# EAGLE board ATmga8_testBoard_v4_print (EAGLE 6.5.0), part 1 of 3
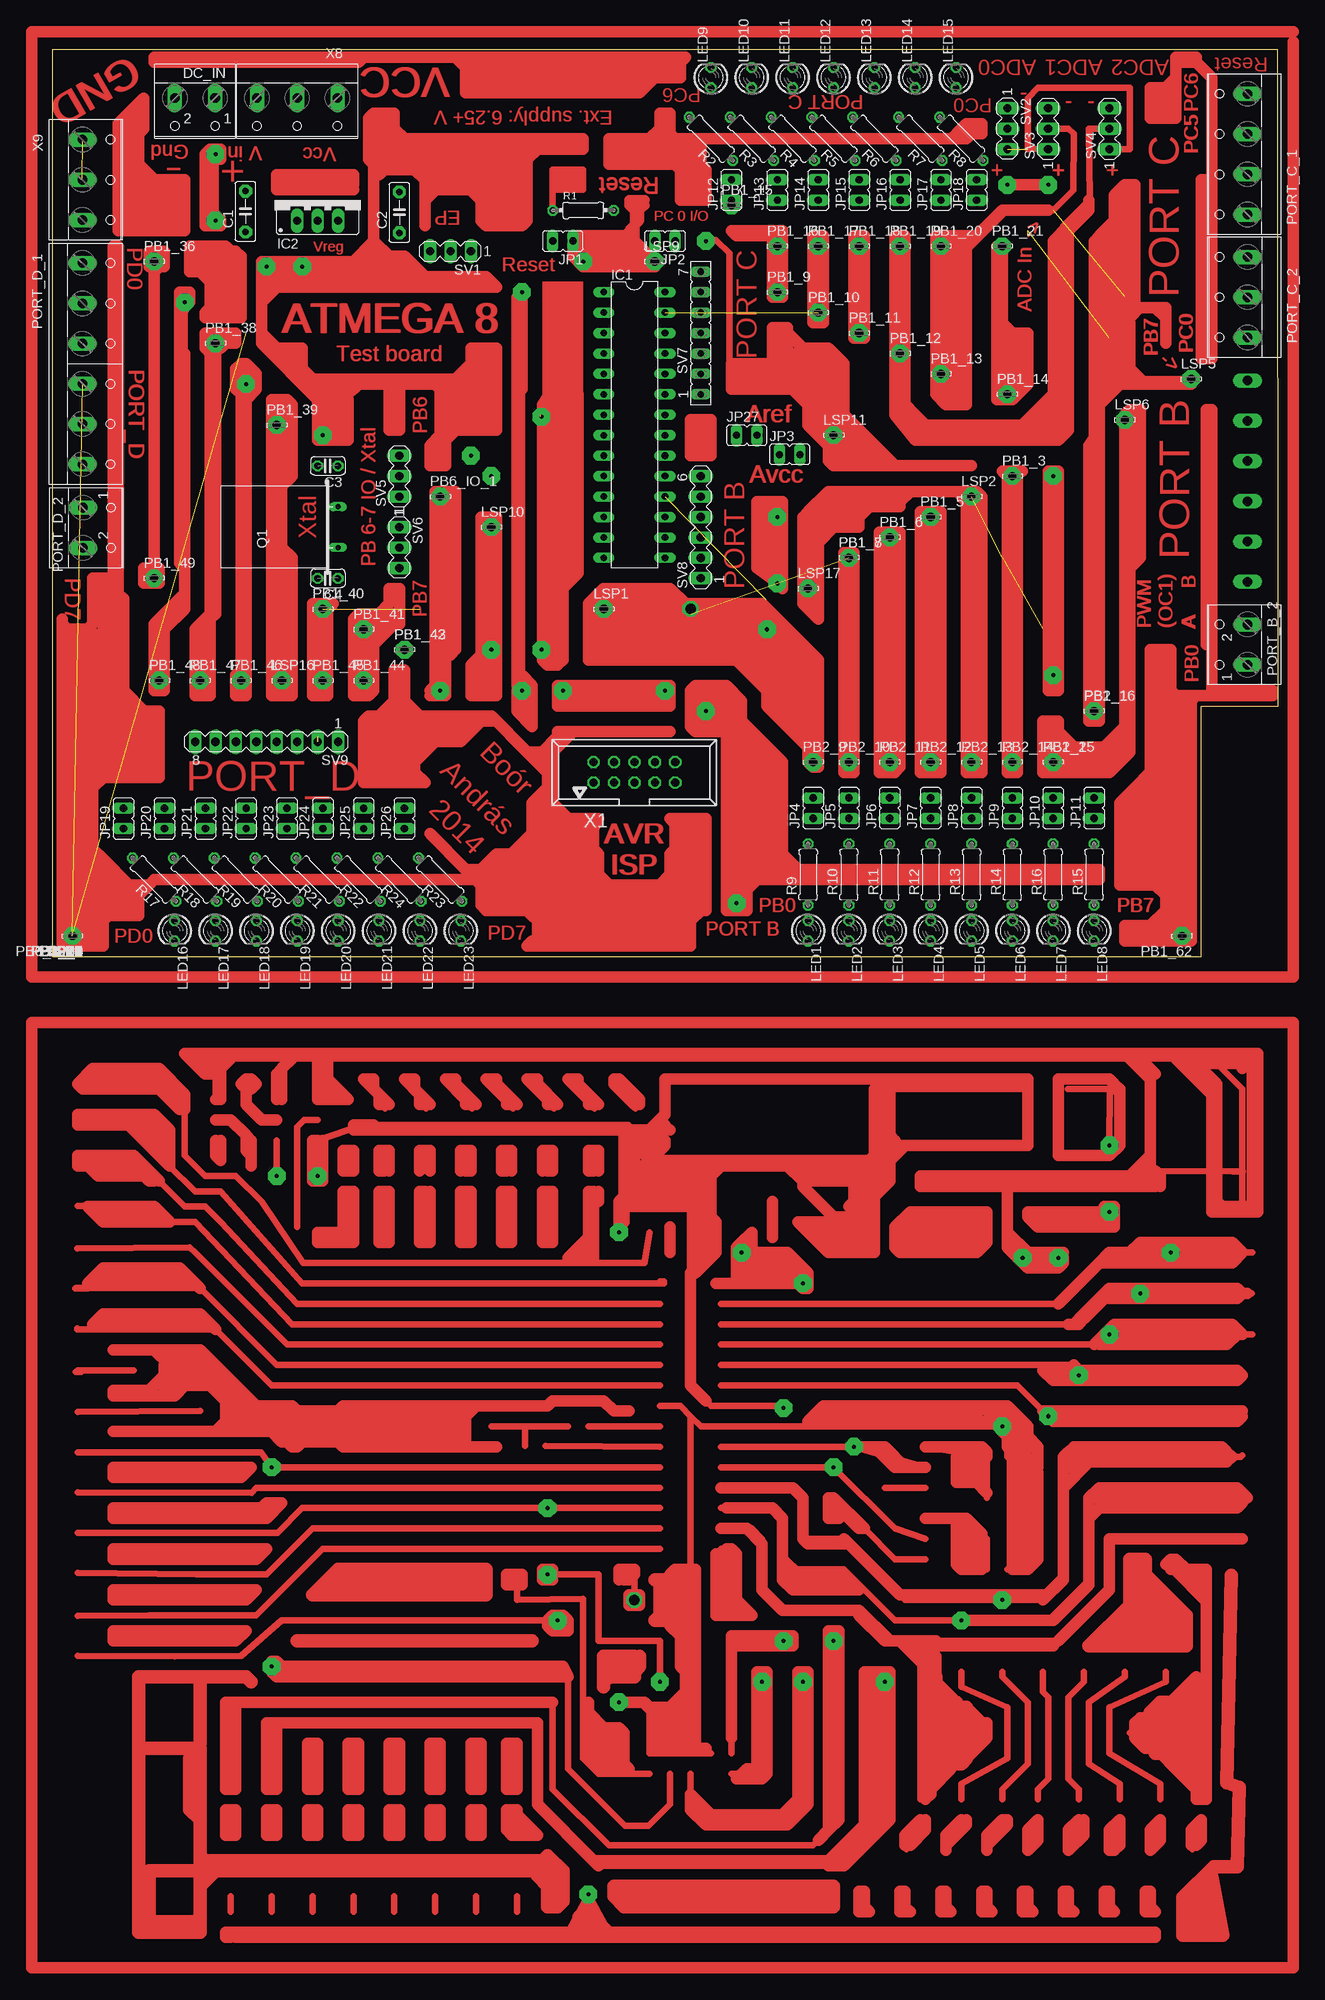
[diagram p0: board, top side]
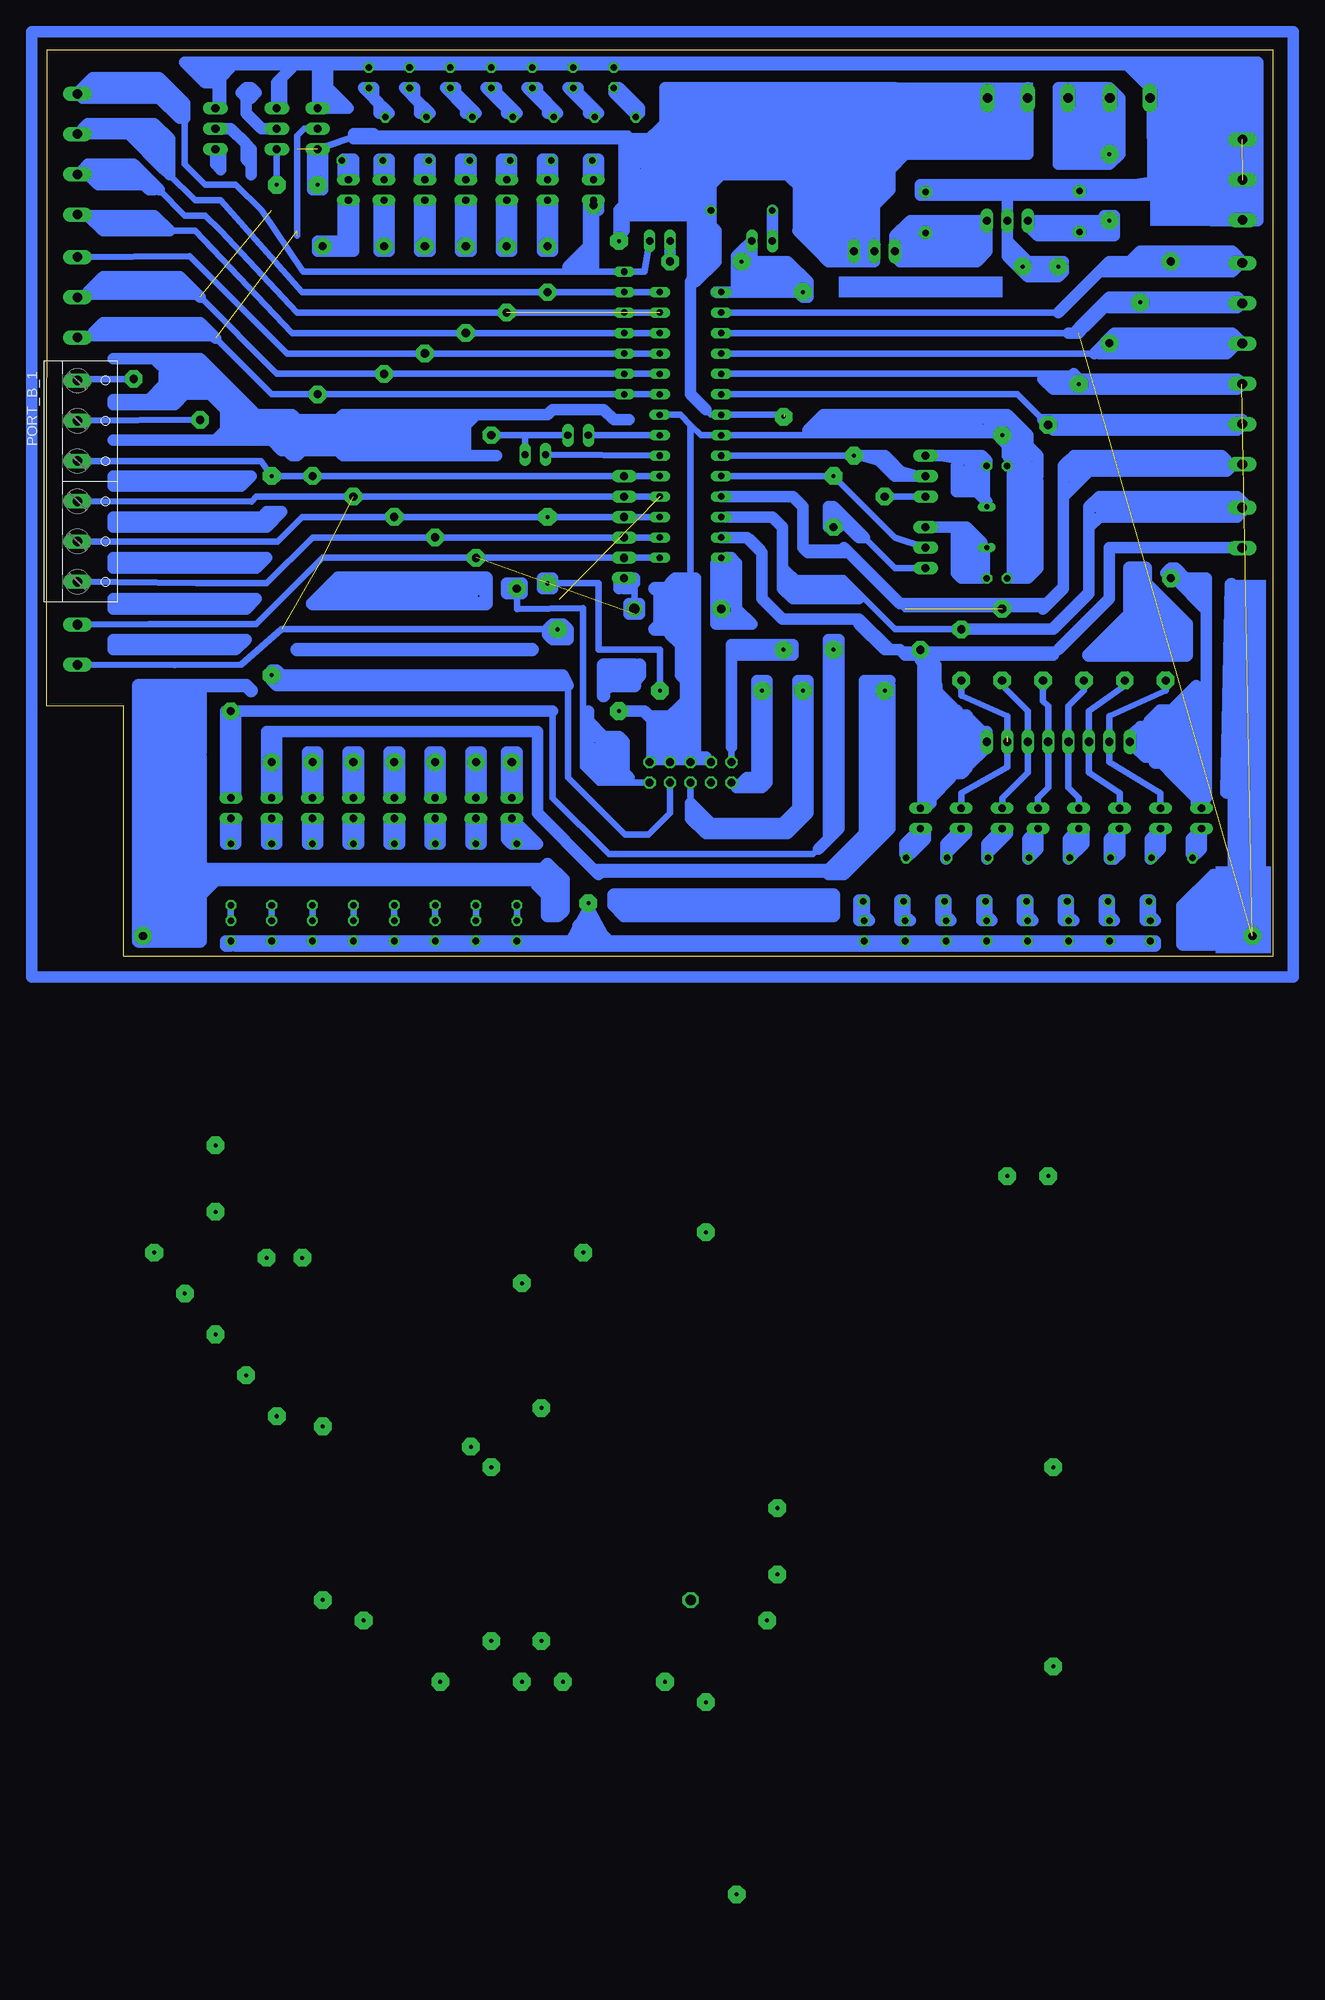
[diagram p1: board, bottom side, seen from below]

Size 152.4 x 112.7 mm. Coordinates in mm from the lower left corner, seen from the top.
Outline: 0,0 142.88,0 142.88,31.11 152.4,31.11 152.38,112.7 0,112.7 0,0
Copper layers (1*16): Top 0.035mm / dielectric 1.5mm / Bottom 0.035mm
Design rules "default": minimum track width 10mil, minimum drill 24mil, track to track 8mil, track to pad 8mil, pad to pad 8mil, via to via 8mil, smd to smd 8mil, copper to edge 40mil, drill to drill 8mil, minimum pad ring 10mil, minimum via ring 8mil, stop-mask expansion 4mil, vias tented up to drill 0mil, thermal gap 10mil

## Footprints (pad centres in the part's own frame; a part is rotated, then mirrored left to right if it is on the bottom)
C5B2.5 = drill 0.813 pad 1.6 octagon: 1 -2.54,0; 2 2.54,0
C025-024X044 = drill 0.813 octagon: 1 -1.27,0; 2 1.27,0
W237-102 = drill 1.194 long: 1 -2.5,-1.27; 2 2.5,-1.27
DIL28-3 = drill 0.813 long: 1 -16.51,-3.81; 2 -13.97,-3.81; 3 -11.43,-3.81; 4 -8.89,-3.81; 5 -6.35,-3.81; 6 -3.81,-3.81; 7 -1.27,-3.81; 8 1.27,-3.81; 9 3.81,-3.81; 10 6.35,-3.81; 11 8.89,-3.81; 12 11.43,-3.81; 13 13.97,-3.81; 14 16.51,-3.81; 15 16.51,3.81; 16 13.97,3.81; 17 11.43,3.81; 18 8.89,3.81; 19 6.35,3.81; 20 3.81,3.81; 21 1.27,3.81; 22 -1.27,3.81; 23 -3.81,3.81; 24 -6.35,3.81; 25 -8.89,3.81; 26 -11.43,3.81; 27 -13.97,3.81; 28 -16.51,3.81
78XXS = drill 1.016 long: GND 0,-2.54; IN -2.54,-2.54; OUT 2.54,-2.54
JP1 = drill 0.914 long: 1 0,-1.27; 2 0,1.27
LED3MM = drill 0.813 octagon: A -1.27,0; K 1.27,0
LSP10 = drill 1.016 pad 2.159 octagon: MP 0,0
W237-6 = drill 1.194 long: 1 -12.5,-1.27; 2 -7.5,-1.27; 3 -2.5,-1.27; 4 2.5,-1.27; 5 7.5,-1.27; 6 12.5,-1.27
W237-4 = drill 1.194 long: 1 -7.5,-1.27; 2 -2.5,-1.27; 3 2.5,-1.27; 4 7.5,-1.27
W237-103 = drill 1.194 long: 1 -5,-1.29; 2 0,-1.29; 3 5,-1.29
Q = drill 0.61 long: 1 -2.54,-7.62; 2 2.54,-7.62
0204/7 = drill 0.813 octagon: 1 -3.81,0; 2 3.81,0
0207/7 = drill 0.813 octagon: 1 -3.81,0; 2 3.81,0
MA03-1 = drill 1.016 long: 1 -2.54,0; 2 0,0; 3 2.54,0
FE07 = drill 0.813 long: 1 -7.62,0; 2 -5.08,0; 3 -2.54,0; 4 0,0; 5 2.54,0; 6 5.08,0; 7 7.62,0
MA06-1 = drill 1.016 long: 1 -6.35,0; 2 -3.81,0; 3 -1.27,0; 4 1.27,0; 5 3.81,0; 6 6.35,0
MA08-1 = drill 1.016 long: 1 -8.89,0; 2 -6.35,0; 3 -3.81,0; 4 -1.27,0; 5 1.27,0; 6 3.81,0; 7 6.35,0; 8 8.89,0
057-010-1 = drill 1 octagon: 1 -5.08,-1.27; 2 -5.08,1.27; 3 -2.54,-1.27; 4 -2.54,1.27; 5 0,-1.27; 6 0,1.27; 7 2.54,-1.27; 8 2.54,1.27; 9 5.08,-1.27; 10 5.08,1.27

## Placement (x,y rotation side)
C1  0.33_uF  [C5B2.5]  24.05,92.57 90 top
C2  0.33_uF  [C5B2.5]  43.18,92.46 90 top
C3  [C025-024X044]  34.29,60.96 180 top
C4  [C025-024X044]  34.29,46.99 180 top
DC_IN  [W237-102]  17.78,105.41 180 top
IC1  ATmega8  [DIL28-3]  72.39,66.04 270 top
IC2  7805_CV  [78XXS]  33.02,93.98 0 top
JP1  PC0_Reset  [JP1]  63.5,88.9 90 top
JP2  PC0_IO  [JP1]  76.2,88.9 90 top
JP3  [JP1]  91.69,62.36 270 top
JP4  [JP1]  94.61,18.41 0 top
JP5  [JP1]  99.06,18.41 0 top
JP6  [JP1]  104.14,18.41 0 top
JP7  [JP1]  109.22,18.41 0 top
JP8  [JP1]  114.3,18.41 0 top
JP9  [JP1]  119.38,18.41 0 top
JP10  [JP1]  124.46,18.41 0 top
JP11  [JP1]  129.54,18.41 0 top
JP12  [JP1]  84.45,95.25 0 top
JP13  [JP1]  90.17,95.25 0 top
JP14  [JP1]  95.25,95.25 0 top
JP15  [JP1]  100.33,95.25 0 top
JP16  [JP1]  105.41,95.25 0 top
JP17  [JP1]  110.49,95.25 0 top
JP18  [JP1]  114.94,95.25 0 top
JP19  [JP1]  8.89,17.14 0 top
JP20  [JP1]  13.97,17.14 0 top
JP21  [JP1]  19.05,17.14 0 top
JP22  [JP1]  24.13,17.14 0 top
JP23  [JP1]  29.21,17.14 0 top
JP24  [JP1]  33.66,17.14 0 top
JP25  [JP1]  38.73,17.14 0 top
JP26  [JP1]  43.81,17.14 0 top
JP27  VREF_VCC  [JP1]  86.36,64.77 270 top
LED1  [LED3MM]  93.98,3.17 270 top
LED2  [LED3MM]  99.06,3.17 270 top
LED3  [LED3MM]  104.14,3.17 270 top
LED4  [LED3MM]  109.22,3.17 270 top
LED5  [LED3MM]  114.3,3.17 270 top
LED6  [LED3MM]  119.38,3.17 270 top
LED7  [LED3MM]  124.46,3.17 270 top
LED8  [LED3MM]  129.54,3.17 270 top
LED9  [LED3MM]  81.92,109.22 90 top
LED10  [LED3MM]  87,109.22 90 top
LED11  [LED3MM]  92.08,109.22 90 top
LED12  [LED3MM]  97.16,109.22 90 top
LED13  [LED3MM]  102.23,109.22 90 top
LED14  [LED3MM]  107.31,109.22 90 top
LED15  [LED3MM]  112.39,109.22 90 top
LED16  [LED3MM]  15.24,3.17 270 top
LED17  [LED3MM]  20.32,3.17 270 top
LED18  [LED3MM]  25.4,3.17 270 top
LED19  [LED3MM]  30.48,3.17 270 top
LED20  [LED3MM]  35.56,3.17 270 top
LED21  [LED3MM]  40.64,3.17 270 top
LED22  [LED3MM]  45.72,3.17 270 top
LED23  [LED3MM]  50.8,3.17 270 top
LSP1  LSP10  [LSP10]  68.58,43.18 0 top
LSP2  LSP10  [LSP10]  114.3,57.15 0 top
LSP3  LSP10  [LSP10]  2.54,2.54 180 top
LSP4  LSP10  [LSP10]  2.54,2.54 180 top
LSP5  LSP10  [LSP10]  141.6,71.75 0 top
LSP6  LSP10  [LSP10]  133.35,66.67 0 top
LSP7  LSP10  [LSP10]  2.54,2.54 180 top
LSP8  LSP10  [LSP10]  2.54,2.54 180 top
LSP9  LSP10  [LSP10]  74.93,86.36 0 top
LSP10  LSP10  [LSP10]  54.61,53.34 0 top
LSP11  LSP10  [LSP10]  97.16,64.77 0 top
LSP12  LSP10  [LSP10]  2.54,2.54 180 top
LSP13  LSP10  [LSP10]  2.54,2.54 180 top
LSP14  LSP10  [LSP10]  2.54,2.54 180 top
LSP15  LSP10  [LSP10]  2.54,2.54 180 top
LSP16  LSP10  [LSP10]  28.57,34.29 0 top
LSP17  LSP10  [LSP10]  93.98,45.72 0 top
LSP18  LSP10  [LSP10]  2.54,2.54 180 top
LSP19  LSP10  [LSP10]  2.54,2.54 180 top
PB1_1  LSP10  [LSP10]  129.54,30.48 0 top
PB1_2  LSP10  [LSP10]  124.46,24.13 0 top
PB1_3  LSP10  [LSP10]  119.38,59.69 0 top
PB1_5  LSP10  [LSP10]  109.22,54.61 0 top
PB1_6  LSP10  [LSP10]  104.14,52.07 0 top
PB1_7  LSP10  [LSP10]  99.06,49.53 0 top
PB1_8  LSP10  [LSP10]  99.06,49.53 0 top
PB1_9  LSP10  [LSP10]  90.17,82.55 0 top
PB1_10  LSP10  [LSP10]  95.25,80.01 0 top
PB1_11  LSP10  [LSP10]  100.33,77.47 0 top
PB1_12  LSP10  [LSP10]  105.41,74.93 0 top
PB1_13  LSP10  [LSP10]  110.49,72.39 0 top
PB1_14  LSP10  [LSP10]  118.75,69.85 0 top
PB1_15  LSP10  [LSP10]  84.45,93.34 0 top
PB1_16  LSP10  [LSP10]  90.17,88.27 0 top
PB1_17  LSP10  [LSP10]  95.25,88.27 0 top
PB1_18  LSP10  [LSP10]  100.33,88.27 0 top
PB1_19  LSP10  [LSP10]  105.41,88.27 0 top
PB1_20  LSP10  [LSP10]  110.49,88.27 0 top
PB1_21  LSP10  [LSP10]  118.11,88.27 0 top
PB1_22  LSP10  [LSP10]  2.54,2.54 180 top
PB1_23  LSP10  [LSP10]  2.54,2.54 180 top
PB1_24  LSP10  [LSP10]  2.54,2.54 180 top
PB1_25  LSP10  [LSP10]  2.54,2.54 180 top
PB1_26  LSP10  [LSP10]  2.54,2.54 180 top
PB1_27  LSP10  [LSP10]  2.54,2.54 180 top
PB1_28  LSP10  [LSP10]  2.54,2.54 180 top
PB1_29  LSP10  [LSP10]  2.54,2.54 180 top
PB1_30  LSP10  [LSP10]  2.54,2.54 180 top
PB1_31  LSP10  [LSP10]  2.54,2.54 180 top
PB1_32  LSP10  [LSP10]  2.54,2.54 180 top
PB1_33  LSP10  [LSP10]  2.54,2.54 180 top
PB1_34  LSP10  [LSP10]  2.54,2.54 180 top
PB1_35  LSP10  [LSP10]  2.54,2.54 180 top
PB1_36  LSP10  [LSP10]  12.7,86.36 0 top
PB1_37  LSP10  [LSP10]  2.54,2.54 180 top
PB1_38  LSP10  [LSP10]  20.32,76.2 0 top
PB1_39  LSP10  [LSP10]  27.94,66.04 0 top
PB1_40  LSP10  [LSP10]  33.66,43.18 0 top
PB1_41  LSP10  [LSP10]  38.73,40.64 0 top
PB1_42  LSP10  [LSP10]  43.81,38.1 0 top
PB1_43  LSP10  [LSP10]  43.81,38.1 0 top
PB1_44  LSP10  [LSP10]  38.73,34.29 0 top
PB1_45  LSP10  [LSP10]  33.66,34.29 0 top
PB1_46  LSP10  [LSP10]  23.5,34.29 0 top
PB1_47  LSP10  [LSP10]  18.41,34.29 0 top
PB1_48  LSP10  [LSP10]  13.34,34.29 0 top
PB1_49  LSP10  [LSP10]  12.7,46.99 0 top
PB1_50  LSP10  [LSP10]  2.54,2.54 180 top
PB1_51  LSP10  [LSP10]  2.54,2.54 180 top
PB1_52  LSP10  [LSP10]  2.54,2.54 180 top
PB1_53  LSP10  [LSP10]  2.54,2.54 180 top
PB1_54  LSP10  [LSP10]  2.54,2.54 180 top
PB1_55  LSP10  [LSP10]  2.54,2.54 180 top
PB1_56  LSP10  [LSP10]  2.54,2.54 180 top
PB1_57  LSP10  [LSP10]  2.54,2.54 180 top
PB1_58  LSP10  [LSP10]  2.54,2.54 180 top
PB1_59  LSP10  [LSP10]  2.54,2.54 180 top
PB1_60  LSP10  [LSP10]  2.54,2.54 180 top
PB1_61  LSP10  [LSP10]  2.54,2.54 180 top
PB1_62  LSP10  [LSP10]  140.46,2.54 180 top
PB2_1  LSP10  [LSP10]  2.54,2.54 180 top
PB2_2  LSP10  [LSP10]  2.54,2.54 180 top
PB2_3  LSP10  [LSP10]  2.54,2.54 180 top
PB2_4  LSP10  [LSP10]  2.54,2.54 180 top
PB2_5  LSP10  [LSP10]  2.54,2.54 180 top
PB2_6  LSP10  [LSP10]  2.54,2.54 180 top
PB2_7  LSP10  [LSP10]  2.54,2.54 180 top
PB2_8  LSP10  [LSP10]  2.54,2.54 180 top
PB2_9  LSP10  [LSP10]  94.61,24.13 0 top
PB2_10  LSP10  [LSP10]  99.06,24.13 0 top
PB2_11  LSP10  [LSP10]  104.14,24.13 0 top
PB2_12  LSP10  [LSP10]  109.22,24.13 0 top
PB2_13  LSP10  [LSP10]  114.3,24.13 0 top
PB2_14  LSP10  [LSP10]  119.38,24.13 0 top
PB2_15  LSP10  [LSP10]  124.46,24.13 0 top
PB2_16  LSP10  [LSP10]  129.54,30.48 0 top
PB2_17  LSP10  [LSP10]  2.54,2.54 180 top
PB2_18  LSP10  [LSP10]  2.54,2.54 180 top
PB2_19  LSP10  [LSP10]  2.54,2.54 180 top
PB2_20  LSP10  [LSP10]  2.54,2.54 180 top
PB2_21  LSP10  [LSP10]  2.54,2.54 180 top
PB2_22  LSP10  [LSP10]  2.54,2.54 180 top
PB2_23  LSP10  [LSP10]  2.54,2.54 180 top
PB6_IO_1  LSP10  [LSP10]  48.26,57.15 0 top
PB6_IO_2  LSP10  [LSP10]  2.54,2.54 180 top
PORT_B_1  [W237-6]  147.32,59.05 270 bottom
PORT_B_2  [W237-102]  147.32,38.73 90 top
PORT_C_1  [W237-4]  147.32,99.69 90 top
PORT_C_2  [W237-103]  147.32,81.92 90 top
PORT_D_1  PORT_D  [W237-6]  5.08,73.66 270 top
PORT_D_2  [W237-102]  5.11,53.26 270 top
Q1  [Q]  27.94,53.34 90 top
R1  10k  [0204/7]  66.04,92.71 0 top
R2  470R  [0207/7]  81.92,101.6 135 top
R3  470R  [0207/7]  87,101.6 135 top
R4  470R  [0207/7]  92.08,101.6 135 top
R5  470R  [0207/7]  97.16,101.6 135 top
R6  470R  [0207/7]  102.23,101.6 135 top
R7  470R  [0207/7]  107.95,101.6 135 top
R8  470R  [0207/7]  113.03,101.6 135 top
R9  470R  [0207/7]  93.98,10.16 90 top
R10  470R  [0207/7]  99.06,10.16 90 top
R11  470R  [0207/7]  104.14,10.16 90 top
R12  470R  [0207/7]  109.22,10.16 90 top
R13  470R  [0207/7]  114.3,10.16 90 top
R14  470R  [0207/7]  119.38,10.16 90 top
R15  470R  [0207/7]  129.54,10.16 90 top
R16  470R  [0207/7]  124.46,10.16 90 top
R17  470R  [0207/7]  12.7,9.53 135 top
R18  470R  [0207/7]  17.78,9.53 135 top
R19  470R  [0207/7]  22.86,9.53 135 top
R20  470R  [0207/7]  27.94,9.53 135 top
R21  470R  [0207/7]  33.02,9.53 135 top
R22  470R  [0207/7]  38.1,9.53 135 top
R23  470R  [0207/7]  48.26,9.53 135 top
R24  470R  [0207/7]  43.18,9.53 135 top
SV1  Power  [MA03-1]  49.53,87.63 180 top
SV2  Pot 1  [MA03-1]  118.75,102.87 270 top
SV3  Pot 2  [MA03-1]  123.83,102.87 90 top
SV4  Pot 3  [MA03-1]  131.44,102.87 90 top
SV5  Xtal/PB6  [MA03-1]  43.18,59.69 90 top
SV6  Xtal/PB7  [MA03-1]  43.18,50.8 270 top
SV7  [FE07]  80.64,77.47 90 top
SV8  [MA06-1]  80.64,53.34 90 top
SV9  [MA08-1]  26.67,26.67 180 top
X1  057-010-1  [057-010-1]  72.39,22.86 0 top
X8  VCC_out  [W237-103]  30.48,105.41 180 top
X9  GND_out  [W237-103]  5.08,96.52 270 top

## Library data of the parts
C1 C2 = capacitor-wima
C3 C4 R2-R24 = rcl
DC_IN PORT_B_2 PORT_D_2 = con-wago-500; MPN: 237-102; OC_FARNELL: unknown; OC_NEWARK: 70K9898
IC1 = ic-package
IC2 = v-reg
JP1-JP27 = jumper
LED1-LED23 = led
LSP1-LSP19 PB1_1-PB1_3 PB1_5-PB1_62 PB2_1-PB2_23 PB6_IO_1 PB6_IO_2 = solpad
PORT_B_1 PORT_C_1 PORT_D_1 = con-wago-500; OC_FARNELL: unknown; OC_NEWARK: unknown
PORT_C_2 X8 X9 = con-wago-500; MPN: 237-103; OC_FARNELL: unknown; OC_NEWARK: 18M7116
Q1 = special
R1 = resistor
SV1-SV6 SV8 SV9 = con-lstb; OC_FARNELL: unknown; OC_NEWARK: unknown
SV7 = con-lsta; OC_FARNELL: unknown; OC_NEWARK: unknown
X1 = con-panduit; OC_FARNELL: unknown; OC_NEWARK: unknown

## Nets
AVCC: IC1.19 PB1_3.MP PORT_B_1.3 SV8.6 X1.7
N$1: C2.1 IC2.OUT SV1.3
N$2: C1.1 DC_IN.1 IC2.IN X8.3
N$3: IC1.1 JP1.1 JP2.2 LSP9.MP X1.5
N$5: IC1.14 LSP1.MP
N$6: LSP3.MP LSP4.MP
N$8: PB1_22.MP PB2_1.MP
N$9: PB1_23.MP PB2_2.MP
N$10: PB1_24.MP PB2_3.MP
N$11: LSP13.MP PB2_4.MP
N$12: LSP8.MP PB6_IO_2.MP
N$13: IC1.20 JP3.1
N$14: LSP7.MP LSP12.MP
N$15: IC1.23 PB1_14.MP PORT_C_2.1 SV2.2
N$16: IC1.24 PB1_13.MP PORT_C_2.2 SV3.2
N$18: IC1.26 PB1_11.MP PORT_C_1.1
N$19: IC1.27 PB1_10.MP PORT_C_1.2
N$20: IC1.28 PB1_9.MP PORT_C_1.3
N$21: JP2.1 PORT_C_1.4
N$22: JP1.2 R1.1
N$23: PB1_25.MP PB2_5.MP
N$24: PB1_26.MP PB2_6.MP
N$25: IC1.10 SV6.2
N$26: IC1.9 SV5.2
N$27: IC1.2 PB1_36.MP PORT_D_1.1
N$28: IC1.3 PB1_37.MP PORT_D_1.2
N$29: IC1.4 PB1_38.MP PORT_D_1.3
N$30: IC1.5 LSP15.MP PORT_D_1.4
N$31: IC1.6 PB1_39.MP PORT_D_1.5
N$32: PB1_28.MP PB2_8.MP
N$33: C4.1 Q1.1 SV6.1
N$34: C3.1 Q1.2 SV5.3
N$35: LSP10.MP SV6.3
N$36: PB6_IO_1.MP SV5.1
N$37: IC1.11 PB1_40.MP PORT_D_1.6
N$38: IC1.12 PB1_41.MP PORT_D_2.1
N$39: IC1.13 PB1_42.MP PORT_D_2.2
N$40: IC1.18 LSP17.MP PORT_B_1.4 SV8.5 X1.9
N$41: IC1.17 PB1_5.MP PORT_B_1.5 SV8.4 X1.1
N$42: IC1.16 PB1_6.MP PORT_B_1.6 SV8.3
N$43: IC1.15 PB1_7.MP PORT_B_2.1 SV8.2
N$44: LSP2.MP PB1_8.MP PORT_B_2.2 SV8.1
N$45: PB1_27.MP PB2_7.MP
N$46: IC1.21 JP27.1
N$47: JP4.1 R9.2
N$48: JP5.1 R10.2
N$49: JP6.1 R11.2
N$50: JP7.1 R12.2
N$51: JP13.1 PB1_16.MP
N$52: JP9.1 R14.2
N$53: JP11.1 R15.2
N$54: JP10.1 R16.2
N$55: LED9.A R2.2
N$56: JP14.1 PB1_17.MP
N$58: JP15.1 PB1_18.MP
N$59: JP17.2 R7.1
N$60: JP17.1 PB1_20.MP
N$61: JP18.1 PB1_21.MP
N$62: JP12.2 R2.1
N$65: JP14.2 R4.1
N$66: JP16.2 R6.1
N$67: JP13.2 R3.1
N$68: JP18.2 R8.1
N$69: LED1.A R9.1
N$70: LED2.A R10.1
N$71: LED3.A R11.1
N$72: LED4.A R12.1
N$73: LED5.A R13.1
N$74: LED7.A R16.1
N$75: LED6.A R14.1
N$76: LED8.A R15.1
N$78: LED10.A R3.2
N$79: LED11.A R4.2
N$80: LED12.A R5.2
N$81: LED13.A R6.2
N$82: LED14.A R7.2
N$83: LED15.A R8.2
N$84: JP4.2 PB2_9.MP
N$85: JP5.2 PB2_10.MP
N$87: JP7.2 PB2_12.MP
N$88: JP8.2 PB2_13.MP
N$89: JP9.2 PB2_14.MP
N$90: JP10.2 PB2_15.MP
N$92: PB1_35.MP PB1_50.MP
N$93: PB1_34.MP PB1_51.MP
N$94: PB1_33.MP PB1_52.MP
N$95: LSP18.MP PB1_32.MP
N$96: LSP14.MP PB1_53.MP
N$97: PB1_31.MP PB1_54.MP
N$98: PB1_30.MP PB1_55.MP
N$99: PB1_29.MP PB1_56.MP
N$100: JP19.1 R17.2
N$101: JP20.1 R18.2
N$102: JP21.1 R19.2
N$104: JP23.1 R21.2
N$105: JP24.1 R22.2
N$107: JP25.1 R24.2
N$108: LED16.A R17.1
N$109: LED17.A R18.1
N$110: LED18.A R19.1
N$111: LED19.A R20.1
N$112: LED20.A R21.1
N$113: LED22.A R24.1
N$114: LED21.A R22.1
N$115: LED23.A R23.1
N$117: JP20.2 PB1_48.MP SV9.7
N$118: JP21.2 PB1_47.MP SV9.6
N$119: JP22.2 PB1_46.MP SV9.5
N$121: JP24.2 PB1_45.MP SV9.3
N$122: JP25.2 PB1_44.MP SV9.2
N$123: JP26.2 PB1_43.MP SV9.1
N$124: PB1_57.MP PB2_17.MP
N$125: PB1_58.MP PB2_18.MP
N$126: LSP19.MP PB2_19.MP
N$127: PB1_59.MP PB2_20.MP
N$128: PB1_60.MP PB2_21.MP
N$129: PB1_61.MP PB2_22.MP
N$130: PB1_62.MP PB2_23.MP
N$137: X9.1 X9.2 X9.3
N$139: C1.2 C2.2 C3.2 C4.2 DC_IN.2 IC1.8 IC1.22 IC2.GND LED1.K LED2.K LED3.K LED4.K LED5.K LED6.K LED7.K LED8.K LED9.K LED10.K LED11.K LED12.K LED13.K LED14.K LED15.K LED16.K LED17.K LED18.K LED19.K LED20.K LED21.K LED22.K LED23.K SV2.1 SV3.3 SV4.3 X1.4 X1.6 X1.8 X1.10
N$152: SV1.1 X1.2
N$161: JP23.2 LSP16.MP SV9.4
N$163: IC1.25 PB1_12.MP PORT_C_2.3 SV4.2
N$168: JP8.1 R13.2
N$173: JP16.1 PB1_19.MP
N$174: JP11.2 PB2_16.MP
N$177: JP15.2 R5.1
N$178: JP12.1 PB1_15.MP
N$186: JP6.2 PB2_11.MP
N$187: LSP6.MP PB1_2.MP PORT_B_1.2
N$188: JP26.1 R23.2
N$189: JP22.1 R20.2
N$209: JP19.2 PB1_49.MP SV9.8
N$216: LSP5.MP PB1_1.MP PORT_B_1.1
VCC: IC1.7 JP3.2 JP27.2 LSP11.MP R1.2 SV1.2 SV2.3 SV3.1 SV4.1 X8.1 X8.2

## Tracks (layer width: path | path; a pad name or v marks a point on that pad's centre or on a via)
AVCC  (via drill 0.5 pad 2.18)
  Top 0.813: v124.46,34.92 v124.46,59.69
  Bottom 0.813: PORT_B_1.3 125.77,61.55 v124.46,59.69 PB1_3.MP SV8.6 IC1.19 | X1.7 74.93,17.78 77.6,15.11 80.52,15.11 87.63,22.23 87.63,33.66 | 88.27,34.92 v124.46,34.92
  Bottom 1.422: 123.83,35.56 123.19,34.92 88.27,34.92 87.63,33.66 123.83,33.66 124.46,34.29 124.46,35.56 123.83,35.56
AVCC1  (via drill 0.5 pad 2.18)
  Top 0.813: 3.17,-61.63 26,-61.63 v27.3,-63.5 75.56,-63.5 | 76.83,-101.6 76.83,-105.41 74.17,-108.08 71.25,-108.08 64.14,-100.97 64.14,-89.53 | 63.5,-88.27 v27.3,-88.27
  Top 1.422: 27.94,-87.63 28.57,-88.27 63.5,-88.27 64.14,-89.53 27.94,-89.53 27.3,-88.9 27.3,-87.63 27.94,-87.63
N$1
  Bottom 0.813: IC2.OUT C2.1 43.18,87.63 SV1.3
  Bottom 1.422: IC2.OUT 35.56,87.63 36.83,86.36 46.35,86.36 46.99,87 46.99,89.53 45.09,91.44 IC2.OUT | IC2.OUT 35.56,88.9 36.83,87.63 45.72,87.63 46.35,87 46.35,88.9 44.45,90.81 37.47,90.81 36.83,90.17 | 36.83,90.17 36.83,90.81 | 36.83,90.17 36.83,88.9 45.72,88.9 44.45,90.17 37.47,90.17
N$2  (via drill 0.5 pad 2.18)  (1 unrouted)
  Top 0.813: v20.32,91.44 20.32,99.06 20.32,99.69
  Top 1.422: 20.95,91.44 19.68,92.71 | 19.68,92.71 19.68,99.69 | 19.68,92.71 19.68,91.44 20.32,90.81 | 20.32,90.81 20.95,90.81 | 20.32,90.81 19.05,90.81 19.05,99.69 19.68,100.33 20.95,100.33 20.95,99.06 20.32,99.06
  Bottom 0.813: IC2.IN C1.1 v20.32,91.44 | 20.32,99.69 20.36,99.73 DC_IN.1 20.28,106.7 X8.3
  Bottom 1.422: 19.68,91.44 19.68,90.81 | 19.68,90.81 19.68,89.53 29.21,89.53 30.48,90.81 IC2.IN 20.95,91.44 | 20.95,91.44 19.68,91.44 | 19.68,91.44 20.32,90.81 | 20.32,90.81 20.95,90.17 28.57,90.17 29.21,90.81 20.32,90.81 | 20.32,90.81 v20.32,91.44 | v20.32,91.44 20.95,92.08 | 20.95,92.08 19.68,92.08 19.68,91.44 | 19.68,90.81 v20.32,91.44 | 20.95,92.08 20.95,91.44
N$3  (via drill 0.5 pad 2.18)
  Top 0.813: JP1.1 64.77,87.63 66.04,86.36 66.67,86.36 LSP9.MP | 58.42,70.48 58.42,34.92 v58.42,33.02
  Top 1.27: 72.39,90.81 70.48,88.9 | 71.75,90.17 73.03,91.44 73.03,92.08 | 73.03,92.71 73.66,93.34 73.66,93.98 71.75,93.98 71.75,93.34 73.03,92.08 | 73.03,92.08 73.03,92.71 | 73.03,92.71 72.39,93.34 72.39,88.9 72.39,88.27
  Top 1.422: 58.42,70.48 v58.42,82.55 57.78,81.92 57.78,33.66 v58.42,33.02 | JP1.1 65.41,89.53 71.75,89.53 72.39,88.9 LSP9.MP 74.93,85.72 66.04,85.72 64.77,87 JP1.1 | JP1.1 70.48,88.9 71.12,88.9 73.03,87 67.31,87 66.67,87.63 | 66.67,87.63 66.04,88.27 65.41,87.63 66.67,86.36 69.22,86.36 71.12,88.27 67.31,88.27 66.67,87.63 | 57.78,33.02 57.78,30.48 59.69,28.57 59.69,33.66 58.42,34.92 58.42,30.48 | 58.42,30.48 58.42,29.84 59.05,29.21 59.05,29.84 58.42,30.48
  Bottom 0.813: IC1.1 67.31,82.55 | 67.31,82.55 66.67,83.19 66.04,83.82 66.04,86.36 64.77,86.36 JP1.1 | LSP9.MP JP2.2 | X1.5 72.39,19.05 72.39,17.78 69.85,15.24 60.96,15.24 58.42,17.78 v58.42,33.02 | v58.42,82.55 66.67,82.55 67.31,82.55
  Bottom 1.422: v58.42,82.55 58.42,83.19 | 59.05,83.19 66.04,83.19 66.04,87.63 JP1.1 | JP1.1 64.77,83.82 65.41,84.45 65.41,83.82 66.67,82.55 | 66.67,82.55 69.22,82.55 | 66.67,82.55 59.05,82.55 58.42,81.92 57.78,81.92 57.78,83.19 | 57.78,83.19 58.42,83.19 | JP1.1 66.67,87 66.67,83.19 | 64.14,86.36 60.33,86.36 57.78,83.82 57.78,83.19 | 58.42,83.19 59.05,83.19 | 59.05,83.19 60.96,85.09 63.5,85.09 64.14,85.72 64.14,84.45 63.5,83.82 61.59,83.82 60.96,84.45 | LSP9.MP 74.93,89.53 | 57.78,34.29 57.78,17.78 60.33,15.24 60.96,15.24 70.48,15.24 72.39,17.14 72.39,19.05 69.85,16.51 60.96,16.51 59.05,18.41 59.05,34.29 57.78,34.29
N$4
  Top 1.422: 110.49,55.24 107.95,55.24 107.95,22.86 110.49,22.86 110.49,55.24 | 110.49,55.24 109.86,53.98 109.86,22.86 108.58,22.86 108.58,54.61
N$5  (via drill 1.3)
  Top 0.813: LSP1.MP v79.38,43.18 87.63,43.18 88.9,41.91 88.9,37.47 | 88.9,33.02 88.9,31.75 92.71,31.75 94.61,31.75 94.61,27.3 94.61,24.77
  Top 1.422: 94.61,27.3 93.98,27.3 90.17,31.11 92.71,31.11 92.71,30.48 95.25,27.94 | 95.25,23.5 94.61,23.5 93.98,24.13 93.98,26.04 88.9,31.11 88.9,33.02 | 88.9,33.02 88.9,37.47 | 88.9,37.47 88.9,39.37 88.27,40.01 84.45,40.01 | 81.92,40.01 69.22,40.01 67.31,41.91 67.31,43.18 67.94,43.81 | 67.94,43.81 77.47,43.81 | 78.74,43.81 88.27,43.81 95.25,36.83 95.25,29.21 | 95.25,27.94 95.25,24.13 | 95.25,27.94 95.25,29.21 | 95.25,29.21 92.71,31.75 | 89.53,34.92 84.45,40.01 | 84.45,40.01 81.92,40.01 | 81.92,40.01 80.64,41.27 67.31,41.27 66.67,40.64 | 66.67,40.64 66.67,40.01 | 66.67,40.01 66.67,38.1 66.67,37.47 | 66.67,37.47 84.45,37.47 | 85.72,37.47 88.9,37.47 | 88.9,37.47 87.63,38.73 | 87.63,38.73 87.63,39.37 87,40.01 66.67,40.01 | 66.67,40.01 67.31,39.37 67.31,38.1 67.94,38.73 87.63,38.73 | 66.67,40.64 66.67,43.81 | 66.67,43.81 67.94,43.81 | 66.67,43.81 68.58,45.72 76.83,45.72 78.74,43.81 | 78.74,43.81 77.47,43.81 | 77.47,43.81 76.2,45.09 68.58,45.09 | 88.9,33.02 85.09,36.83 | 85.09,36.83 84.45,37.47 | 84.45,37.47 85.72,37.47 | 85.72,37.47 86.36,36.83 87,36.83 89.53,34.29 | 85.09,36.83 66.67,36.83 66.67,37.47
  Bottom 0.813: IC1.14 LSP1.MP
  Bottom 1.422: LSP1.MP 67.94,43.81 67.94,48.9 69.22,48.9 69.22,41.91 | 69.22,41.91 67.31,41.91 66.67,42.55 66.67,43.18 | 66.67,43.18 66.67,48.9 67.31,49.53 67.94,49.53 | 66.67,43.18 64.77,41.27 69.22,41.27 69.22,41.91 | v79.38,43.18 78.74,43.18 79.38,42.55 | 79.38,42.55 80.01,42.55 80.01,43.81 78.74,43.81 78.74,42.55 79.38,42.55
N$6  (1 unrouted)
N$7
  Top 1.422: 41.91,70.48 41.91,65.41 43.18,65.41 43.18,70.48
N$8  (1 unrouted)
N$9  (1 unrouted)
N$10  (1 unrouted)
N$11  (1 unrouted)
N$12  (1 unrouted)
N$13
  Bottom 0.813: JP3.1 IC1.20
N$14  (1 unrouted)
N$15  (2 unrouted)
  Bottom 0.813: PB1_14.MP 124.46,69.85 131.44,76.83 148.61,76.83 PORT_C_2.1 | SV2.2 120.4,102.87 121.28,101.98 121.28,89.53 | IC1.23 PB1_14.MP | 121.28,69.85 PB1_14.MP
  Bottom 1.422: 131.44,76.83 133.35,78.74 145.41,78.74 146.69,77.47 133.35,77.47
N$16  (1 unrouted)
  Top 0.813: SV3.2 126.36,102.87 127,102.23 126.95,95.2 124.46,92.71 123.83,92.71 118.75,92.71 114.3,88.27 113.67,88.27 | 112.39,88.27 110.49,88.27
  Top 1.422: 111.12,68.58 109.86,69.85 109.86,89.53 111.12,89.53 | 111.12,68.58 111.12,89.53 | 111.12,89.53 114.94,89.53 | 114.94,89.53 118.11,92.71 123.83,92.71 | 114.94,89.53 114.3,88.9 | 111.12,68.58 113.67,68.58 113.67,88.27 112.39,88.27 112.39,69.22 111.76,69.85 111.76,87.63
  Bottom 0.813: 148.78,81.98 133.35,81.97 123.83,72.39 PB1_13.MP IC1.24 | 148.78,81.98 147.32,81.92 PORT_C_2.2 148.91,81.92 148.78,81.98
  Bottom 1.422: SV3.2 125.73,102.87 127.64,104.78 127.64,106.68 | 127.64,106.68 127,106.68 126.36,107.31 127,107.95 127.64,107.95 128.27,107.31 127.64,106.68
N$17
  Top 1.422: 113.67,88.9 111.76,88.9
N$18
  Bottom 0.813: 143.63,92.19 139.06,92.19 | 139.06,92.19 137.16,90.17 133.99,90.17 121.92,77.47 PB1_11.MP IC1.26 | PORT_C_1.1 143.63,92.19 | 143.63,92.19 143.5,92.19 139.06,92.19
  Bottom 1.422: 137.79,90.17 145.41,90.17 147.32,92.08 139.06,92.08 137.16,90.17 138.43,90.17 139.7,91.44 141.6,91.44 143.51,91.44 145.41,91.44
N$19  (1 unrouted)
  Bottom 0.813: 140.34,97.34 139.7,96.52 138.43,95.25 135.25,92.08 132.72,92.08 130.81,90.17 121.28,80.01 IC1.27 | 140.34,97.34 140.33,97.34 PORT_C_1.2 | 140.34,97.34 148.8,97.35
  Bottom 1.422: 139.7,95.89 139.06,95.89 | 139.06,95.89 138.43,95.25 | 139.06,95.89 141.6,98.42 147.32,98.42 147.96,97.79 146.05,95.89 139.7,95.89 | 139.7,95.89 139.06,95.25 139.7,95.25 141.6,97.16 144.78,97.16 145.41,96.52
N$20
  Bottom 0.813: PORT_C_1.3 138.43,102.23 138.43,102.19 137.25,100.92 137.25,97.18 133.99,93.98 130.81,93.98 120.65,82.55 120.57,82.53 PB1_9.MP IC1.28 | IC1.28 75.69,82.55 75.69,82.8 76.2,82.8 IC1.28
N$21
  Bottom 0.813: JP2.1 78.11,85.09 120.57,85.06 125.73,92.71 128.91,95.89 132.72,95.89 135.25,98.42 135.25,104.14 135.25,105.41 137.16,107.31 139.82,107.44 PORT_C_1.4
  Bottom 1.422: 135.25,104.78 135.25,106.05 138.43,109.22 146.69,109.22 148.59,107.31 147.96,106.68 138.43,106.68 135.89,104.14 135.25,104.14 135.25,104.78 | 135.25,104.78 139.06,108.58 145.41,108.58 146.69,107.31 139.7,107.31 139.06,107.95
N$22
  Top 0.813: R1.1 62.23,95.25 | 62.23,95.25 66.04,95.25 66.04,97.79 62.23,97.79 62.23,97.16 | 62.23,97.16 62.23,95.89 | 64.14,95.89 65.41,95.89 65.41,97.16 62.23,97.16 | 62.23,97.16 62.87,96.52 64.77,96.52 64.14,95.89 | 64.14,95.89 62.23,95.89 | 62.23,95.89 62.23,95.25
  Bottom 0.813: R1.1 JP1.2
  Bottom 1.422: R1.1 62.23,88.27
N$23  (1 unrouted)
N$24  (1 unrouted)
N$25  (via drill 0.5 pad 2.18)
  Bottom 0.813: IC1.10 v54.61,59.69 46.99,52.07 SV6.2
N$26  (via drill 0.5 pad 2.18)
  Bottom 0.813: IC1.9 v52.07,62.23 SV5.2
  Bottom 1.422: SV5.2 44.45,59.69 45.72,59.69 | 45.72,59.69 46.99,59.69 49.53,62.23 v52.07,62.23 48.26,62.23 45.72,59.69
N$27  (via drill 0.5 pad 2.18)
  Bottom 0.813: 3.81,86.36 5.28,86.36 | 5.28,86.36 PORT_D_1.1 3.81,86.36 | 5.28,86.36 PB1_36.MP 20.32,86.36 26.67,80.01 IC1.2 | 3.81,86.36 2.54,86.36
  Bottom 1.422: 3.81,86.36 5.08,85.09 21.59,85.09 | 21.59,85.09 26.67,80.01 | 21.59,85.09 20.32,86.36 17.78,86.36 16.51,87.63 5.08,87.63 3.81,86.36 | 3.81,86.36 16.51,86.36 17.14,85.72
  other vias: 12.7,86.36
N$28  (via drill 0.5 pad 2.18)  (1 unrouted)
  Bottom 0.813: 20.32,81.28 v16.51,81.28 3.81,81.28 | 3.17,81.28 2.66,81.28 PORT_D_1.2 | IC1.3 25.4,77.47
  Bottom 1.422: 3.17,81.28 3.81,81.28 | 3.81,81.28 4.45,81.92 20.32,81.92 24.13,78.11 | 24.13,78.11 23.5,78.11 | 23.5,78.11 20.32,81.28 20.32,80.64 4.45,80.64 3.81,81.28 | 23.5,78.11 24.13,77.47 24.77,77.47 | 25.4,77.47 24.77,77.47 | 24.77,77.47 24.13,78.11
N$29  (via drill 0.5 pad 2.18)
  Top 1.422: 19.68,41.91 19.68,32.38 17.78,32.38 17.78,40.64 19.68,42.55 | 19.68,41.91 20.32,42.55 PB1_38.MP 20.95,75.56 21.59,76.2 21.59,77.47 | 21.59,77.47 20.95,77.47 | 20.95,77.47 19.05,77.47 19.05,75.56 19.68,74.93 19.68,42.55 | 19.68,42.55 19.68,41.91 | 19.68,41.91 19.05,41.27 19.05,33.02 | 20.95,77.47 20.95,76.2 22.86,76.2 22.86,77.47 21.59,77.47
  Bottom 0.813: 21.59,74.93 21.27,75.25 | 21.27,75.25 PB1_38.MP | PB1_38.MP 10.2,76.2 PORT_D_1.3 | PB1_38.MP 5.08,76.2 3.81,76.2 2.54,76.2 | IC1.4 22.23,74.93 21.59,74.93 | 21.59,74.93 21.27,74.93 21.27,75.25
  Bottom 1.422: 22.23,74.93 19.68,77.47 5.08,77.47 3.81,76.2 4.45,76.2 5.71,74.93 21.59,74.93 19.68,76.83 5.71,76.83 5.08,76.2 19.68,76.2 20.32,75.56
  other vias: 20.32,76.2
N$30  (via drill 0.5 pad 2.18)  (1 unrouted)
  Top 1.422: 23.5,73.03 24.77,71.75 v24.13,71.12
  Bottom 0.813: PORT_D_1.4 3.85,71.12 v24.13,71.12 25.4,72.39 IC1.5
N$31  (via drill 0.5 pad 2.18)
  Bottom 0.813: PORT_D_1.5 3.93,66.04 PB1_39.MP 28.57,66.67 31.75,69.85 IC1.6
  Bottom 1.422: 3.81,66.67 28.57,66.67 27.3,65.41 4.45,65.41 3.81,66.04
  other vias: 27.94,66.04
N$32  (1 unrouted)
N$33
  Bottom 0.813: 38.1,53.34 Q1.1 C4.1
  Bottom 1.422: SV6.1 38.1,53.34 36.2,51.44 36.2,50.16 | 36.2,46.99 38.73,46.99 39.37,47.62 39.37,52.7 38.73,52.7 36.2,50.16 | 36.2,50.16 36.2,48.26 38.73,48.26 38.1,48.9 38.1,51.44 37.47,50.8 37.47,48.9
N$34
  Bottom 0.813: SV5.3 C3.1 35.56,56.52 Q1.2
  Bottom 1.422: 35.56,56.52 36.83,57.78 39.37,57.78 39.37,60.96 38.73,60.33 36.2,60.33 36.2,58.42 36.83,59.05 38.73,59.05 36.83,60.96 C3.1 35.56,61.59 36.2,62.23 SV5.3
N$35
  Bottom 0.813: SV6.3 46.99,48.26 50.8,52.07 52.07,53.34 53.98,53.34 LSP10.MP
  Bottom 1.422: 52.7,53.98 53.34,54.61 54.61,55.88 55.24,55.88 55.24,53.34 53.98,53.34 54.61,53.98 54.61,55.24 51.44,52.07 50.8,52.07 52.7,53.98
N$36
  Bottom 0.813: SV5.1 PB6_IO_1.MP
N$37  (via drill 0.5 pad 2.18)  (1 unrouted)
  Bottom 0.813: 52.7,50.16 45.72,43.18 PB1_40.MP 29.21,43.18 28.57,43.81 26.04,46.35 26.04,57.15 | 53.34,50.8 58.42,50.8 | 26.04,60.96 25.4,60.96 5.08,60.96 4.01,60.96 PORT_D_1.6
  Bottom 1.422: 5.71,61.59 6.35,62.23 24.77,62.23 25.4,61.59 | 25.4,60.96 25.4,61.59 | 25.4,61.59 26.04,60.96 | 26.04,57.15 26.04,45.72 28.57,43.18 | 26.04,57.15 26.04,60.96 | 26.04,60.96 25.4,60.33 25.4,59.69 24.77,60.33 22.86,60.33 | 22.86,60.33 5.71,60.33 5.08,60.96 5.71,61.59 | 5.71,61.59 24.13,61.59 22.86,60.33 | 22.86,60.33 26.04,57.15 | IC1.11 59.69,57.15 58.42,55.88 58.42,50.8 57.78,50.16 52.7,50.16 | 52.7,50.16 53.34,50.8 | 28.57,43.81 46.35,43.81 52.7,50.16
  other vias: 33.66,43.18
N$38  (via drill 0.5 pad 2.18)
  Bottom 0.813: PORT_D_2.1 22.9,55.84 22.9,45.68 27.94,40.64 38.1,40.64 PB1_41.MP 46.99,40.64 53.34,46.99 60.96,46.99 60.96,48.26 | 67.94,54.61 IC1.12
  Bottom 1.422: 51.44,44.45 59.69,44.45 60.96,45.72 60.96,48.26 | 60.96,48.26 60.96,53.34 62.23,54.61 67.94,54.61 | 60.33,46.35 59.05,46.35 | 59.05,46.35 53.98,46.35 53.34,45.72 | 52.7,45.09 53.34,45.72 | 53.34,45.72 59.69,45.72 | 60.96,48.26 59.05,46.35 | 38.1,40.64 27.3,40.64 22.86,45.09 22.86,53.34 | 22.86,53.34 22.86,55.88 | 22.86,55.88 3.81,55.88 | 3.81,55.24 4.45,54.61 21.59,54.61 22.86,53.34 | 22.86,55.88 21.59,57.15 4.45,57.15 3.17,55.88
  other vias: 38.73,40.64
N$39
  Bottom 0.813: 65.41,52.07 64.77,52.07 63.5,50.8 63.5,50.16 | 60.96,41.91 52.07,41.91 48.26,38.1 | 46.35,38.1 PB1_42.MP 26.67,38.1 | 20.32,50.8 3.85,50.8 | 3.85,50.8 PORT_D_2.2 3.81,50.8 3.85,50.8
  Bottom 1.422: 27.3,37.47 45.72,37.47 46.35,38.1 47.62,38.1 | 47.62,38.1 48.26,38.1 51.44,41.27 51.44,41.91 | 51.44,41.91 60.96,41.91 63.5,44.45 63.5,50.16 65.41,52.07 IC1.13 | 51.44,41.91 47.62,38.1 | 26.67,38.1 20.32,44.45 20.32,50.8 3.81,50.8 | 38.1,26.67 38.1,28.57 36.83,27.3 36.83,25.4 | 38.1,24.77 38.1,26.67 | 38.1,26.67 41.91,30.48 41.91,26.67 | 41.91,24.13 41.91,26.67 | 41.91,26.67 40.64,27.94 40.01,27.94 38.1,29.84 | 38.1,29.84 38.73,29.84 41.91,33.02 | 41.91,26.67 40.64,25.4 40.01,25.4 | 40.01,25.4 39.37,26.04 39.37,26.67 40.01,27.3 | 40.01,27.3 40.01,25.4 | 40.01,27.3 40.01,30.48 41.91,32.38 41.91,33.66 41.91,36.2 PB1_42.MP 43.81,36.83 42.55,35.56 42.55,21.59 | 42.55,19.68 42.55,19.05 43.18,18.41 43.18,35.56 | 40.01,22.86 40.01,22.23 42.55,19.68 | 42.55,19.68 42.55,21.59 | 42.55,21.59 41.27,22.86 | 38.1,23.5 35.56,26.04 35.56,27.94 36.2,27.94 38.1,29.84
  Bottom 1.676: 41.91,33.66 41.91,33.02 41.91,32.38 41.91,30.48 41.91,28.57 38.1,28.57 38.1,29.84 40.64,29.84 40.64,31.11 40.01,30.48 39.37,30.48 | 41.27,23.5 41.91,22.86 41.27,22.86 40.01,22.86 38.73,22.86 38.1,23.5 38.1,24.77 41.91,24.77 41.91,24.13 41.91,23.5 41.27,23.5 | 41.27,23.5 39.37,23.5
N$40  (1 unrouted)
  Bottom 0.813: PORT_B_1.4 126.96,56.52 126.36,57.15 SV8.5 IC1.18 | X1.9 83.82,21.59 85.72,23.5 85.72,43.31 93.98,43.18 LSP17.MP
N$41  (via drill 0.5 pad 2.18)
  Top 0.813: v63.5,33.02 v76.2,33.02 | v90.17,46.35 v90.17,54.61
  Bottom 0.813: PORT_B_1.5 123.7,51.55 120.65,54.61 PB1_5.MP v90.17,54.61 SV8.4 IC1.17 76.71,54.61 | X1.1 63.5,21.59 v63.5,33.02 | v76.2,33.02 76.2,38.1 83.82,38.1 83.82,46.35 89.53,46.35 v90.17,46.35
  Bottom 1.422: v90.17,46.35 89.53,45.72 90.81,45.72 90.81,46.99 89.53,46.99 89.53,46.35
N$42
  Bottom 0.813: PORT_B_1.6 133.78,46.35 125.09,46.35 119.38,52.07 PB1_6.MP SV8.3 IC1.16
N$43  (via drill 0.5 pad 2.18)  (1 unrouted)
  Bottom 0.813: 118.11,49.53 PB1_7.MP SV8.2 IC1.15 | PORT_B_2.1 136.53,36.2 128.23,36.23 123.19,40.64 90.17,40.64 v88.9,40.64
  Bottom 1.422: 90.17,40.64 89.53,41.27 88.27,41.27 87.63,40.64 87.63,39.37 89.53,39.37 90.17,40.01 90.17,40.64
N$44  (2 unrouted)
  Bottom 0.813: PB1_8.MP 118.11,49.53 126.36,41.27 139.66,41.27 PORT_B_2.2 | SV8.1 79.38,46.99 | 79.38,46.35 79.38,42.55
  Bottom 1.422: 81.28,46.35 80.64,46.35 | 80.01,46.35 79.38,46.35 79.38,46.99 81.28,46.99 81.28,45.72 80.64,46.35 | 80.64,46.35 80.01,46.35 | 80.01,46.35 80.01,45.72 80.64,45.72
N$45  (1 unrouted)
N$46
  Bottom 0.813: JP27.1 IC1.21
N$47
  Bottom 0.813: JP4.1 R9.2
  Bottom 1.422: 93.98,16.51 93.98,14.61 | 93.98,14.61 R9.2 | R9.2 94.61,13.97 95.25,14.61 95.25,17.14 JP4.1 | R9.2 91.44,13.97 93.98,16.51 | 93.98,17.14 93.98,16.51 | 93.98,14.61 93.34,14.61
N$48
  Bottom 0.813: R10.2 JP5.1
N$49
  Bottom 0.813: JP6.1 R11.2
N$50
  Bottom 0.813: R12.2 JP7.1
N$51
  Top 0.813: PB1_16.MP 90.17,82.55
  Bottom 0.813: JP13.1 PB1_16.MP
  Bottom 1.422: 89.53,87.63 89.53,93.98 JP13.1 90.81,93.98 90.81,87.63 89.53,87.63
N$52
  Bottom 0.813: JP9.1 R14.2
N$53
  Bottom 0.813: R15.2 JP11.1
N$54
  Bottom 0.813: R16.2 JP10.1
N$55
  Bottom 0.813: LED9.A R2.2
  Bottom 1.422: 78.74,104.78 78.74,105.41 81.28,107.95 LED9.A 81.92,107.31 79.38,104.78
N$56
  Top 0.813: PB1_17.MP 95.25,80.01
  Bottom 0.813: JP14.1 PB1_17.MP
  Bottom 1.422: 94.61,87.63 95.89,87.63 95.89,93.98 JP14.1 94.61,93.98 94.61,87.63
N$57
  Bottom 1.422: 111.12,93.98 111.12,87.63 109.86,87.63 109.86,93.98 111.12,93.98
N$58
  Top 0.813: PB1_18.MP 100.33,77.47
  Bottom 0.813: JP15.1 PB1_18.MP
N$59
  Bottom 0.813: R7.1 JP17.2
  Bottom 1.422: 109.86,96.52 109.86,99.06 111.12,99.06 111.12,96.52 JP17.2
N$60
  Top 0.813: PB1_20.MP 110.49,72.39
  Bottom 0.813: JP17.1 PB1_20.MP
N$61
  Top 0.813: PB1_21.MP 118.75,69.85
  Bottom 0.813: JP18.1 114.94,88.27 PB1_21.MP
N$62
  Bottom 0.813: JP12.2 R2.1
  Bottom 1.422: 83.82,96.52 83.82,99.06 85.09,99.06 85.09,96.52 JP12.2
N$63
  Bottom 1.422: 86.36,107.95 86.36,107.31 83.82,104.78 85.09,104.78 85.09,105.41 87.63,107.95 86.36,107.95
N$64
  Bottom 1.422: 92.71,107.95 91.44,107.95 91.44,107.31 88.9,104.78 90.17,104.78 90.17,105.41 92.71,107.95
N$65
  Bottom 0.813: R4.1 JP14.2
  Bottom 1.422: 94.61,96.52 94.61,99.06 95.89,99.06 95.89,96.52 JP14.2
N$66
  Bottom 0.813: R6.1 JP16.2
N$67
  Bottom 0.813: JP13.2 R3.1
  Bottom 1.422: 90.81,96.52 90.81,99.06 89.53,99.06 89.53,96.52 JP13.2
N$68
  Bottom 0.813: R8.1 JP18.2
N$69
  Bottom 0.813: R9.1 LED1.A
N$70
  Bottom 0.813: R10.1 LED2.A
N$71
  Bottom 0.813: LED3.A R11.1
N$72
  Bottom 0.813: R12.1 LED4.A
N$73
  Bottom 0.813: R13.1 LED5.A
N$74
  Bottom 0.813: R16.1 LED7.A
N$75
  Bottom 0.813: R14.1 LED6.A
N$76
  Bottom 0.813: R15.1 LED8.A
N$77
  Bottom 1.422: 113.03,107.95 111.76,107.95 111.76,106.68 109.86,104.78 111.12,104.78 111.12,106.05 113.03,107.95
N$78
  Bottom 0.813: LED10.A R3.2
N$79
  Bottom 0.813: LED11.A R4.2
N$80
  Bottom 0.813: LED12.A R5.2
  Bottom 1.422: LED12.A 96.52,107.95 96.52,107.31 93.98,104.78 95.25,104.78 95.25,105.41 97.79,107.95 LED12.A
N$81
  Bottom 0.813: LED13.A R6.2
N$82
  Bottom 0.813: LED14.A R7.2
  Bottom 1.422: LED14.A 106.68,107.95 106.68,106.68 104.78,104.78 106.05,104.78 106.05,106.05 107.95,107.95 LED14.A
N$83
  Bottom 0.813: R8.2 LED15.A
N$84
  Bottom 0.813: PB2_9.MP JP4.2
N$85
  Top 0.813: PB2_10.MP 99.06,49.53
  Bottom 0.813: JP5.2 99.06,20.32 PB2_10.MP
  Bottom 1.422: 99.69,19.68 99.69,23.5 99.69,24.13 | 99.69,24.13 98.42,24.13 | 98.42,24.13 98.42,19.68 99.06,20.32 | 98.42,24.13 98.42,25.4 99.69,25.4 99.69,24.13
N$86
  Top 1.422: 76.83,33.66 76.83,31.11 62.87,31.11 62.87,33.66 76.83,33.66 | 76.83,33.66 76.2,33.02 76.2,32.38 63.5,32.38
N$87
  Top 0.813: PB2_12.MP 109.22,54.61
  Bottom 0.813: JP7.2 109.22,20.32
  Bottom 1.422: 109.22,20.32 PB2_12.MP
N$88
  Top 0.813: PB2_13.MP 114.3,24.77 114.3,57.15 113.03,57.78 106.68,57.78 97.16,57.78 93.98,55.24 93.98,45.72
  Top 1.422: 106.68,57.78 96.52,57.78 93.98,55.24 93.34,54.61 93.34,43.81 95.25,41.91 95.25,51.44 | 106.68,57.78 114.94,57.78 115.57,57.15 115.57,26.67 | 115.57,26.67 115.57,26.04 | 115.57,26.04 114.3,24.77 114.3,55.88 114.94,56.52 113.67,56.52 | 113.03,57.15 113.67,56.52 | 113.67,56.52 113.67,22.86 115.57,22.86 115.57,26.04 | 115.57,26.67 114.94,26.04 114.94,23.5 | 95.25,51.44 95.25,55.24 94.61,55.24 94.61,43.18 | 95.25,51.44 97.16,53.34 100.33,53.34 100.33,54.61 101.6,55.88 105.41,55.88 105.41,56.52 | 106.68,57.78 105.41,56.52 | 105.41,56.52 95.89,56.52 95.89,55.24 | 95.89,55.24 95.89,53.34 97.16,54.61 | 97.16,54.61 97.79,55.24 | 97.79,55.24 100.33,55.24 99.69,54.61 97.16,54.61 | 97.16,54.61 96.52,55.24 96.52,55.88 | 98.42,55.88 97.79,55.24 | 97.79,55.24 95.89,55.24
  Bottom 1.422: JP8.2 PB2_13.MP | 113.67,24.13 114.3,23.5 JP8.2 | JP8.2 113.67,20.32 113.67,24.13 | 113.67,24.13 114.94,24.13 | 114.94,24.13 114.94,20.32 | 113.67,24.13 113.67,25.4 114.94,25.4 114.94,24.13
N$89
  Top 0.813: PB2_14.MP 119.38,59.69
  Bottom 1.422: PB2_14.MP JP9.2 120.02,19.68 120.02,25.4 118.75,25.4 118.75,19.68
N$90  (via drill 0.5 pad 2.18)
  Top 0.813: v48.26,33.02 48.26,57.15
  Bottom 0.813: PB2_15.MP 124.46,27.94 91.44,27.94 | 91.44,17.78 91.44,17.53 84.07,10.16 83.82,10.16 55.24,10.16 | 53.34,10.16 48.26,15.24 v48.26,33.02 | JP10.2 124.46,20.32
  Bottom 1.422: 47.62,33.66 47.62,15.88 53.34,10.16 53.98,10.16 | 53.98,10.16 53.98,11.43 | 53.98,11.43 53.98,12.06 | 53.98,12.06 50.8,15.24 50.8,34.29 47.62,34.29 48.9,33.02 49.53,33.02 49.53,15.88 53.34,12.06 53.34,11.43 48.9,15.88 48.9,32.38 | 53.98,11.43 54.61,10.79 | 54.61,10.79 55.24,10.16 53.98,10.16 | 124.46,20.32 PB2_15.MP | 123.83,19.68 123.83,24.13 | 123.83,24.13 125.09,24.13 | 125.09,24.13 125.09,19.68 JP10.2 | 123.83,24.13 123.83,27.3 125.09,27.3 | 125.09,27.3 125.09,24.13 | 125.09,27.3 125.09,27.94 91.44,27.94 91.44,17.78 84.45,10.79 | 84.45,10.79 83.82,10.16 83.19,10.79 | 83.19,10.79 55.24,10.79 | 54.61,10.79 55.24,10.79 | 55.24,10.79 53.98,12.06 | 83.19,10.79 84.45,10.79
N$91
  Bottom 1.422: 80.01,22.23 80.64,22.86 80.64,26.67 81.28,27.3 83.19,27.3 | 84.45,27.3 83.19,27.3 | 83.19,27.3 85.09,29.21 | 85.09,29.21 85.09,30.48 | 85.09,29.21 85.09,23.5 83.82,22.23 81.28,22.23 81.92,22.86 81.92,23.5 | 81.92,23.5 81.92,26.67 82.55,26.04 83.82,26.04 83.82,22.86 83.19,23.5 81.92,23.5 | 81.92,23.5 82.55,24.13 82.55,25.4
N$92  (1 unrouted)
N$93  (1 unrouted)
N$94  (1 unrouted)
N$95  (1 unrouted)
N$96  (1 unrouted)
N$97  (1 unrouted)
N$98  (1 unrouted)
N$99  (1 unrouted)
N$100
  Bottom 0.813: JP19.1 R17.2
  Bottom 1.422: 10.16,12.7 10.16,14.61 JP19.1 8.89,13.34 9.53,12.7
N$101
  Bottom 0.813: R18.2 JP20.1
  Bottom 1.422: JP20.1 13.97,13.34 15.24,12.06 15.24,14.61 JP20.1
N$102
  Bottom 0.813: JP21.1 R19.2
  Bottom 1.422: JP21.1 19.05,12.7 19.68,12.06 20.32,12.06 20.32,14.61 JP21.1
N$103
  Bottom 1.422: 133.35,81.92 135.89,84.45 145.41,84.45 147.32,82.55 135.25,82.55 135.25,83.19 135.89,83.82 145.41,83.82 146.05,83.19
N$104
  Bottom 0.813: JP23.1 R21.2
  Bottom 1.422: 30.48,12.06 30.48,14.61 JP23.1 29.21,13.34 30.48,12.06
N$105
  Bottom 0.813: JP24.1 R22.2
  Bottom 1.422: 35.56,12.06 35.56,12.7 | 35.56,12.7 35.56,13.97 JP24.1 33.02,15.88 33.02,15.24 35.56,12.7
N$106
  Top 1.422: 60.96,37.47 62.23,37.47 62.87,36.83 62.87,66.67 63.5,67.31 62.87,67.31 | 61.59,67.31 60.96,67.31 | 60.96,67.31 60.96,38.1 | 60.96,38.1 62.23,36.83 62.23,44.45 | 62.23,46.99 62.23,66.67 61.59,67.31 | 61.59,67.31 62.87,67.31 | 62.87,67.31 63.5,66.67 63.5,36.83 62.87,36.2 61.59,36.2 60.96,36.83 60.96,38.1 | 60.96,67.31 60.96,68.58 62.23,70.48 64.77,70.48 65.41,69.85 65.41,47.62 62.23,44.45 | 62.23,44.45 62.23,46.99 | 62.23,46.99 64.14,48.9 64.14,48.26
N$107
  Bottom 0.813: JP25.1 R24.2
  Bottom 1.422: 38.1,15.88 38.1,15.24 40.64,12.7 | 40.64,12.7 40.64,12.06 | 40.64,12.7 40.64,13.97 39.37,15.24 JP25.1
N$108
  Bottom 0.813: R17.1 LED16.A
N$109
  Bottom 0.813: R18.1 LED17.A
N$110
  Bottom 0.813: LED18.A R19.1
N$111
  Bottom 0.813: R20.1 LED19.A
N$112
  Bottom 0.813: R21.1 LED20.A
N$113
  Bottom 0.813: R24.1 LED22.A
N$114
  Bottom 0.813: R22.1 LED21.A
N$115
  Bottom 0.813: R23.1 LED23.A
N$116
  Bottom 1.422: 137.79,98.42 137.79,97.79 | 137.79,97.79 137.16,97.16 137.16,99.69 | 137.79,97.79 142.24,102.23 147.96,102.23 147.96,102.87 147.32,103.5 139.06,103.5 137.16,101.6 137.16,99.69 | 137.16,99.69 140.34,102.87 141.6,102.87 | 142.24,102.87 141.6,102.87 | 141.6,102.87 137.79,99.06
N$117
  Top 0.813: PB1_48.MP 13.34,41.27 16.51,44.45 16.51,45.09 | 16.51,46.99 16.51,74.93 16.51,80.64 16.51,81.28
  Top 1.422: 12.7,40.64 12.7,39.37 12.7,33.02 13.97,33.02 13.97,40.64 | 12.7,40.64 13.97,40.64 | 13.97,40.64 16.51,43.18 16.51,45.09 | 16.51,48.26 16.51,74.93 15.88,75.56 | 15.88,75.56 15.88,80.01 | 15.88,80.01 15.88,82.55 17.14,82.55 17.14,81.28 16.51,80.64 15.88,80.01 | 15.88,75.56 15.88,48.9 16.51,48.26 | 16.51,48.26 16.51,46.99 16.51,45.09 | 16.51,45.09 12.7,41.27 12.7,40.64
  Bottom 0.813: PB1_48.MP 13.34,33.02 20.32,29.84 SV9.7 20.32,24.13 13.97,20.32 JP20.2
N$118
  Top 0.813: PB1_47.MP 18.41,41.27 20.32,43.18 20.32,76.2
  Bottom 0.813: PB1_47.MP 18.41,33.66 22.86,30.48 SV9.6 22.86,22.86 19.05,20.32 JP21.2
N$119
  Top 0.813: PB1_46.MP 23.5,40.01 24.13,40.64 24.13,71.12
  Bottom 0.813: JP22.2 24.13,19.68 25.4,20.95 25.4,25.4 SV9.5 25.4,31.11 23.5,33.02 PB1_46.MP
N$120
  Top 0.813: 116.2,-31.75 108.58,-33.27 108.58,-35.56 104.78,-35.56
  Top 1.422: 116.2,-34.29 116.2,-35.56 114.94,-36.83 105.41,-36.83 104.78,-36.2 104.78,-33.66 106.68,-31.75 116.2,-31.75 116.2,-34.29 | 116.2,-34.29 114.94,-35.56 106.05,-35.56 105.41,-36.2 105.41,-34.29 107.31,-32.38 114.3,-32.38 114.94,-33.02 | 114.94,-33.02 114.94,-32.38 | 114.94,-33.02 114.94,-34.29 106.05,-34.29 107.31,-33.02 114.3,-33.02
N$121
  Top 0.813: PB1_45.MP 33.66,43.18
  Bottom 0.813: PB1_45.MP 33.66,33.66 30.48,30.48 SV9.3 30.48,22.86 33.66,19.68 JP24.2
N$122  (2 unrouted)
  Top 0.813: PB1_44.MP 38.73,40.01
  Bottom 0.813: PB1_44.MP 38.73,32.38 33.02,29.84 SV9.2 33.02,23.5 38.73,20.32 JP25.2
N$123
  Bottom 0.813: JP26.2 43.81,26.67 | 43.81,26.67 PB1_43.MP | SV9.1 43.81,26.67
N$124  (1 unrouted)
N$125  (1 unrouted)
N$126  (1 unrouted)
N$127  (1 unrouted)
N$128  (1 unrouted)
N$129  (1 unrouted)
N$130  (1 unrouted)
N$131
  Bottom 1.422: 93.34,45.09 95.25,45.09 95.25,46.35 93.34,46.35 93.34,45.09
N$132
  Bottom 1.676: 5.21,46.23 5.71,20.45 4.19,19.94 4.45,10.03 7.37,10.03 11.18,6.22 11.18,1.52 6.22,1.52 7.62,8.76 10.29,4.57 10.03,2.29 6.86,2.54 8.51,6.22 8.76,3.05
N$133  (via drill 0.5 pad 2.18)
  other vias: 66.04,86.36
N$134
  Bottom 1.676: 16.51,46.99 10.79,41.27 10.79,37.47 22.86,37.47 17.78,42.55 17.78,48.26 15.88,48.26 15.88,43.18 12.06,39.37 12.06,38.1 12.7,38.73 20.32,38.73 16.51,42.55 16.51,45.72 12.06,41.27 12.06,40.01 18.41,40.01 17.14,41.27 15.24,41.27
N$135  (via drill 0.5 pad 2.18)
  other vias: 20.32,99.69
N$136  (via drill 0.5 pad 2.18)
  other vias: 60.83,67.06
N$137
  Bottom 0.813: X9.1 3.79,100.35 3.81,101.6 X9.2 X9.3
N$138  (via drill 0.5 pad 2.18)
  Top 1.422: v123.83,95.89 v118.75,95.89
N$139  (via drill 0.5 pad 2.18)  (1 unrouted)
  Top 0.813: v81.28,30.48 82.55,30.48 85.09,27.94 85.09,7.62 | 85.09,6.99 v85.09,6.6 | 40.01,88.9 36.83,85.72 v31.11,85.72 v26.67,85.72 26.04,85.09 26.04,81.28 | 43.81,101.6 62.23,101.6 | 62.23,101.6 65.41,101.6 | 65.41,101.6 66.04,101.6 | 62.23,101.6 62.23,100.33 | 65.41,101.6 65.41,100.97 62.87,100.97 | 33.02,66.04 33.02,69.85 26.04,76.83 26.04,77.47 | v33.66,64.77 33.66,65.41 | 33.66,65.41 33.02,66.04 | 33.02,66.04 33.02,64.77 33.66,64.14 | 34.29,64.14 34.29,65.41 33.66,65.41
  Top 1.422: 87.63,9.53 130.18,9.53 130.18,10.79 92.71,10.79 | 85.09,6.35 83.82,6.35 | 83.82,6.35 83.82,27.3 | 83.82,27.3 84.45,27.94 80.01,27.94 79.38,28.57 79.38,33.02 80.01,33.66 83.82,33.66 85.72,31.75 85.72,29.21 | 85.72,29.21 85.72,9.53 | 85.72,9.53 85.72,7.62 | 85.72,7.62 85.72,5.71 | 85.72,5.71 83.82,5.71 83.82,6.35 | 83.82,27.3 83.82,32.38 85.09,31.11 85.09,27.3 | 85.09,6.99 85.09,7.62 | 85.09,7.62 85.09,27.3 | 85.09,27.3 83.19,29.21 80.01,29.21 80.01,32.38 82.55,32.38 83.19,33.02 83.19,30.48 80.64,30.48 80.64,31.75 81.92,31.75 82.55,31.11 | 85.09,7.62 87.63,10.16 90.81,10.16 90.81,10.79 | 90.81,10.79 90.81,24.13 87,27.94 | 85.72,29.21 87,27.94 | 87,27.94 87,26.04 | 87,26.04 87,24.77 87.63,24.13 89.53,24.13 87.63,26.04 87,26.04 | 33.02,64.14 33.66,64.14 34.29,64.14 | 34.29,64.14 34.29,69.85 | 34.29,69.85 32.38,71.75 | 32.38,71.75 31.11,73.03 | 31.11,73.03 28.57,75.56 | 28.57,75.56 27.94,75.56 27.3,76.2 | 27.3,76.2 26.04,76.2 | 26.04,76.2 33.02,69.22 33.02,64.14 | 33.02,64.14 v33.66,64.77 | 26.04,76.2 26.04,77.47 | 26.04,77.47 26.04,81.28 | 26.04,83.19 26.04,86.36 37.47,86.36 40.01,88.9 | 40.01,88.9 40.01,98.42 | 40.01,98.42 40.01,100.33 | 40.01,100.33 41.27,101.6 42.55,101.6 | 42.55,101.6 43.18,101.6 | 43.18,101.6 43.81,101.6 | 43.81,101.6 66.04,101.6 66.04,100.33 62.23,100.33 | 62.23,100.33 61.59,100.97 44.45,100.97 41.27,97.79 | 41.27,97.79 40.64,97.16 40.64,99.69 41.27,100.33 41.91,100.33 43.18,101.6 | 43.18,101.6 43.18,100.97 41.27,99.06 | 27.94,83.19 28.57,83.82 39.37,83.82 40.01,84.45 40.01,88.9 | 27.94,83.19 26.04,81.28 | 26.04,81.28 26.04,83.19 | 26.04,83.19 27.94,85.09 38.1,85.09 38.73,84.45 38.73,85.72 39.37,86.36 38.1,86.36 37.47,85.72
  Top 1.422: 27.3,76.2 26.04,77.47 | 32.38,71.75 50.16,71.75 53.34,74.93 55.24,74.93 | 55.24,74.93 55.24,71.75 | 55.24,71.75 55.24,71.12 | 55.24,71.12 53.98,71.12 | 53.98,71.12 47.62,71.12 | 47.62,71.12 38.1,71.12 | 38.1,71.12 34.92,71.12 34.29,70.48 34.29,69.85 | 27.94,83.19 55.24,83.19 53.98,84.45 46.35,84.45 43.81,87 40.64,87 40.64,84.45 45.09,84.45 | 45.72,84.45 45.09,84.45 | 45.09,84.45 43.18,86.36 41.91,86.36 | 41.91,86.36 41.27,85.72 43.18,85.72 43.81,85.09 | 41.91,86.36 41.91,87 40.01,88.9 | 41.27,97.79 45.09,97.79 46.35,96.52 | 46.35,96.52 46.99,95.89 | 46.99,95.89 51.44,95.89 | 51.44,95.89 53.34,93.98 53.34,91.44 53.98,90.81 58.42,90.81 59.05,91.44 59.05,99.06 | 59.05,99.06 59.05,100.33 47.62,100.33 | 47.62,100.33 44.45,100.33 43.18,99.06 58.42,99.06 58.42,92.71 57.78,92.08 53.98,92.08 53.98,93.98 53.34,94.61 57.15,94.61 57.15,92.71 55.24,92.71 54.61,93.34 55.24,93.34 55.88,93.98 56.52,93.98 57.78,95.25 53.34,95.25 52.7,95.89 52.07,95.89 50.16,97.79 | 50.16,97.79 46.35,97.79 | 46.35,97.79 45.72,98.42 | 46.35,97.79 47.62,96.52 48.9,96.52 | 54.61,96.52 56.52,96.52 57.15,95.89 57.15,98.42 50.8,98.42 | 50.16,98.42 50.8,98.42 | 50.8,98.42 52.07,97.16 55.88,97.16 56.52,97.79 50.16,97.79 | 50.16,97.79 47.62,100.33 | 46.35,96.52 46.35,95.25 | 46.35,95.25 46.35,93.98 | 46.35,90.81 46.35,93.98 | 46.35,93.98 48.9,96.52 | 48.9,96.52 54.61,96.52 | 54.61,96.52 53.98,95.89 53.34,95.89 | 53.34,95.89 51.44,95.89 | 46.99,95.89 46.35,95.25 | 46.35,95.25 52.7,95.25 53.34,95.89 | 85.72,9.53 87,10.79 | 90.81,10.79 92.71,10.79 | 92.71,10.79 90.17,13.34 | 47.62,71.12 48.26,70.48 | 48.26,70.48 48.9,69.85 48.9,65.41 | 48.9,65.41 48.9,64.14
  Top 1.422: 48.9,64.14 48.9,60.96 46.99,60.96 46.99,63.5 48.26,64.77 | 48.9,64.14 50.16,65.41 | 50.16,65.41 55.24,65.41 55.24,71.12 | 55.24,71.75 53.34,69.85 49.53,69.85 50.16,69.22 50.16,66.67 | 50.16,66.67 50.16,65.41 | 50.16,65.41 50.8,66.04 52.07,66.04 | 52.07,66.04 54.61,66.04 53.98,66.67 53.98,71.12 | 53.98,71.12 51.44,68.58 50.8,68.58 51.44,67.94 51.44,67.31 52.07,67.31 52.7,67.94 52.7,69.22 53.34,68.58 53.34,67.31 52.07,66.04 | 48.9,65.41 48.26,64.77 | 48.26,64.77 48.26,61.59 | 34.29,64.14 35.56,64.14 | 35.56,64.14 35.56,69.22 36.83,70.48 37.47,70.48 | 37.47,70.48 36.83,69.85 | 36.83,69.85 34.92,69.85 | 36.83,69.85 36.2,69.22 | 36.2,69.22 34.92,67.94 | 42.55,101.6 42.55,102.87 | 42.55,102.87 42.55,104.78 40.01,104.78 39.37,104.14 39.37,99.06 40.01,98.42 | 40.01,100.33 40.01,102.87 41.27,104.14 41.27,103.5 41.91,102.87 41.27,102.23 | 42.55,102.87 43.81,101.6 | 62.23,100.33 60.33,100.33 | 59.69,100.33 60.33,100.33 | 60.33,100.33 59.05,99.06 | 37.47,70.48 38.1,71.12 | 36.2,69.22 36.2,64.14 | 36.2,64.14 35.56,64.14 | 36.2,64.14 36.83,64.14 36.83,69.22 | 48.26,70.48 48.26,64.77 | 50.16,66.67 51.44,66.67 | 31.11,73.03 31.11,75.56 28.57,75.56 | 28.57,75.56 29.84,74.93 | 52.07,74.3 52.07,75.56 55.24,75.56 55.24,74.93 | 85.72,5.71 86.36,5.71 86.36,9.53 87.63,9.53 | 87.63,9.53 85.72,7.62
  Bottom 0.813: C4.2 32.38,46.99 31.75,46.99 29.21,48.26 | 29.21,59.05 29.21,59.69 31.75,60.96 C3.2 33.02,63.5 34.29,64.77 | 72.39,66.04 71.12,64.77 IC1.8 34.29,64.77 | 72.39,66.04 73.66,67.31 IC1.22 | X1.6 72.39,24.77 72.39,29.21 72.39,31.75 72.39,32.38 72.39,33.66 | 72.39,35.56 72.39,42.55 72.39,44.45 72.39,45.72 72.39,46.99 72.39,66.04 | X1.6 X1.8 X1.10 77.47,29.21 78.74,30.48 80.64,30.48 v81.28,30.48 | X1.4 X1.6 | LED8.K LED7.K LED6.K LED5.K LED4.K LED3.K LED2.K LED1.K 87.63,1.91 v85.09,6.6 82.55,1.91 LED23.K LED22.K LED21.K LED20.K LED19.K LED18.K LED17.K LED16.K | 15.24,96.52 C1.2 33.02,95.89 | 15.24,96.52 15.24,96.48 DC_IN.2 15.24,96.52 | 33.02,95.89 33.02,93.98 IC2.GND 33.02,87.63 v31.11,85.72 29.84,85.72 v26.67,85.72 | C2.2 33.02,95.89 | 3.77,96.44 5,96.44 15.24,96.52 | 3.81,101.54 3.81,106.68 7.62,110.49 12.06,110.49 LED9.K LED10.K LED11.K LED12.K LED13.K LED14.K LED15.K 117.47,110.49 118.75,110.49 | 118.75,109.86 118.75,110.49 | 123.83,108.58 122.56,110.49 | 122.56,110.49 121.92,110.49 118.75,110.49 | SV4.3 131.44,108.58 131.44,109.22 130.81,109.86 130.18,110.49 122.56,110.49 | 34.29,64.77 v33.66,64.77
  Bottom 1.422: 26.04,85.72 26.04,85.09 26.67,84.45 30.48,84.45 33.02,87 33.02,88.9 | 57.78,65.41 55.88,67.31 36.2,67.31 | 35.56,66.67 34.92,66.04 33.02,66.04 30.48,63.5 | 30.48,63.5 29.21,62.23 29.21,59.69 31.11,61.59 32.38,61.59 33.02,62.23 33.02,64.77 30.48,62.23 29.84,62.23 30.48,62.87 32.38,62.87 33.66,64.14 33.66,65.41 57.15,65.41 55.88,66.67 55.24,66.67 54.61,66.04 36.83,66.04 | 31.11,60.96 31.11,48.26 30.48,48.9 29.84,48.9 29.84,59.69 29.21,59.05 29.21,48.26 30.48,46.99 32.38,46.99 32.38,62.23 | 32.38,66.67 33.02,67.31 36.2,67.31 | 36.2,67.31 35.56,66.67 | 35.56,66.67 32.38,66.67 | 32.38,66.67 30.48,64.77 30.48,63.5 | 72.39,24.77 71.75,25.4 | 71.75,25.4 71.75,46.99 | 71.75,25.4 71.75,24.77 | 71.75,24.77 70.48,24.77 | 71.75,24.77 76.83,24.77 76.83,29.21 76.2,29.84 | 76.2,29.84 73.03,29.84 | 76.2,29.84 77.47,29.84 78.11,30.48 80.64,30.48 | 75.56,28.57 75.56,25.4 74.93,26.04 73.03,26.04 72.39,26.67 72.39,29.21 73.03,28.57 75.56,28.57 | 75.56,28.57 74.93,27.94 74.93,27.3 73.03,27.3 | 75.56,29.21 73.03,31.75 | 72.39,32.38 73.03,31.75 | 73.03,31.75 73.03,30.48 | 72.39,45.72 74.93,45.72 74.93,40.01 73.66,38.73 | 73.66,38.73 72.39,37.47 | 72.39,37.47 72.39,35.56 | 72.39,35.56 72.39,33.66 | 72.39,33.66 72.39,31.75 | 72.39,37.47 72.39,42.55 73.66,41.27 | 73.66,41.27 73.66,39.37 | 73.66,41.27 73.66,45.09 73.03,44.45 72.39,44.45 73.03,43.81 73.03,43.18 | 74.93,46.35 74.3,46.99 72.39,46.99 | 72.39,33.66 73.66,34.92 73.66,38.73 | 72.39,35.56 73.03,34.92 73.03,31.75 | LED8.K 128.91,1.27 83.82,1.27 | 83.82,1.27 81.92,1.27 | 81.92,1.27 85.09,4.45 85.09,5.08 86.36,3.81 86.36,1.91 83.82,1.91 85.09,3.17 85.72,3.17 83.82,1.27